# EAGLE board power_ver2 (EAGLE 9.6.2)

Size 100 x 100 mm. Coordinates in mm from the lower left corner, seen from the top.
Outline: 0,0 100,0 100,100 0,100 0,0
Copper layers (1*16): Top 0.035mm / dielectric 1.5mm / Bottom 0.035mm
Design rules "default": minimum track width 6mil, minimum drill 0.35mm, track to track 6mil, track to pad 6mil, pad to pad 6mil, via to via 6mil, smd to smd 6mil, copper to edge 40mil, drill to drill 6mil, minimum pad ring 10mil, minimum via ring 8mil, stop-mask expansion 4mil, vias tented up to drill 0mil, thermal gap 10mil
Net classes: 0 default: width 1.016 mm; 1 power: width 2.54 mm, clearance 0.127 mm; 3 jet: width 3.81 mm, clearance 0.127 mm
Holes 3 mm at 3,97 3,3 97,96 97,3

## Footprints (pad centres in the part's own frame; a part is rotated, then mirrored left to right if it is on the bottom)
LED5MM = drill 0.813 octagon: A -1.27,0; K 1.27,0
SRIDE_SWITCH = drill 1: L -2.5,0; LR 0,0; R 2.5,0
C4111-15 = drill 1.499 long: A 7.62,0; C -7.62,0
2PIN = drill 1.4 square: P$1 -2.54,0; P$2 2.54,0
AC01 = drill 1.1 pad 2: 1 -8.9,0; 2 8.9,0
2SJ334 = drill 0.9 square: DRAIN 6.35,2.54; GATE 3.81,2.54; SOURCE 8.89,2.54
DCDCDEV = hole 3: 3,0; 3,21.5; 34.5,21.5; 34.5,0

## Placement (x,y rotation side)
A_ON  [LED5MM]  10,28 90 top
ARD  SRIDE_SWITCH  [SRIDE_SWITCH]  5,37 90 top
ARDUINO  1N5908  [C4111-15]  71,72 270 top
ARDUINO5V-IN  [2PIN]  85,73 180 top
ARDUINO5V-OUT1  [2PIN]  61,90 0 top
ARDUINO5V-OUT2  [2PIN]  78,90 0 top
ARDUINO18V-OUT  [2PIN]  84.87,10.15 0 top
ARDUINO-IN  [2PIN]  9.3,68 90 top
EMERGENCY  [2PIN]  10.3,15 90 top
J_ON  [LED5MM]  10,46 90 top
JET  SRIDE_SWITCH  [SRIDE_SWITCH]  5,55 90 top
JETSON  1N5908  [C4111-15]  43,72 270 top
JETSON5V-IN  [2PIN]  57,73 180 top
JETSON5V-IN1  [2PIN]  29,73 180 top
JETSON5V-OUT1  [2PIN]  39,90 0 top
JETSON18V-OUT  [2PIN]  28.34,10.15 0 top
JETSON18V-OUT1  [2PIN]  56,10 0 top
JETSON-IN  [2PIN]  9.4,83 90 top
R1  [AC01]  24,41 90 bottom
R2  [AC01]  34,41 90 bottom
R3  [AC01]  52,41 90 bottom
R4  [AC01]  64,41 90 bottom
R5  [AC01]  80,41 90 bottom
R6  [AC01]  91,41 90 bottom
U$1  2SJ334  [2SJ334]  17,88 0 top
U$2  DCDCDEV  [DCDCDEV]  68.46,22.47 90 top
U$4  2SJ334  [2SJ334]  17,95 0 top
U$5  2SJ334  [2SJ334]  17,81 0 top
U$6  DCDCDEV  [DCDCDEV]  96.46,22.37 90 top
U$23  DCDCDEV  [DCDCDEV]  40.06,22.47 90 top

## Library data of the parts
A_ON J_ON = led
ARD JET = Sride Switch
ARDUINO JETSON = diode
ARDUINO5V-IN ARDUINO5V-OUT1 ARDUINO5V-OUT2 ARDUINO18V-OUT ARDUINO-IN EMERGENCY JETSON5V-IN JETSON5V-IN1 JETSON5V-OUT1 JETSON18V-OUT JETSON18V-OUT1 JETSON-IN = TB113-2B-x-x-0-x-x
R1-R6 = resistor-power; OC_FARNELL: unknown; OC_NEWARK: unknown
U$1 U$4 U$5 = 2SJ334
U$2 U$6 U$23 = dcdcDEVkit

## Nets
18V [power]: JETSON-IN.P$2 JETSON.A
GND: A_ON.K ARDUINO5V-IN.P$2 ARDUINO5V-OUT1.P$2 ARDUINO5V-OUT2.P$2 ARDUINO18V-OUT.P$2 ARDUINO-IN.P$1 J_ON.K JETSON5V-IN1.P$2 JETSON5V-IN.P$2 JETSON5V-OUT1.P$2 JETSON18V-OUT1.P$2 JETSON18V-OUT.P$2 JETSON-IN.P$1
IN: EMERGENCY.P$1
MA [power]: JETSON.C R4.2 U$1.SOURCE U$4.SOURCE
MAC [jet]: JETSON18V-OUT1.P$1 JETSON18V-OUT.P$1 R1.2
MAD [jet]: JETSON5V-IN1.P$1 JETSON5V-IN.P$1 JETSON5V-OUT1.P$1
MBB [power]: ARDUINO-IN.P$2 ARDUINO.A
MKK [power]: ARDUINO.C R3.2 U$5.SOURCE
ML [power]: ARDUINO5V-IN.P$1 ARDUINO5V-OUT1.P$1 ARDUINO5V-OUT2.P$1
MOO [power]: ARDUINO18V-OUT.P$1 R5.2 U$5.DRAIN
N$1: ARD.L R3.1 U$5.GATE
N$2: J_ON.A R2.2
N$3: A_ON.A R6.2
N$4 [power]: U$1.DRAIN U$4.DRAIN
N$6: R5.1 R6.1
N$43 [power]: JET.L R4.1 U$1.GATE U$4.GATE
N$49: R1.1 R2.1
OUT: ARD.LR EMERGENCY.P$2 JET.LR

## Tracks (layer width: path | path; a pad name or v marks a point on that pad's centre or on a via)
18V  (7 unrouted)
GND  (59 unrouted)
MA  (12 unrouted)
MAC  (10 unrouted)
MAD  (10 unrouted)
MBB  (6 unrouted)
MKK  (17 unrouted)
ML  (10 unrouted)
MOO  (17 unrouted)
N$1  (11 unrouted)
N$2  (4 unrouted)
N$3  (6 unrouted)
N$4  (1 unrouted)
N$6  (3 unrouted)
N$43  (16 unrouted)
N$49  (3 unrouted)
OUT  (11 unrouted)